# EAGLE board G22V4 (EAGLE 9.6.2)
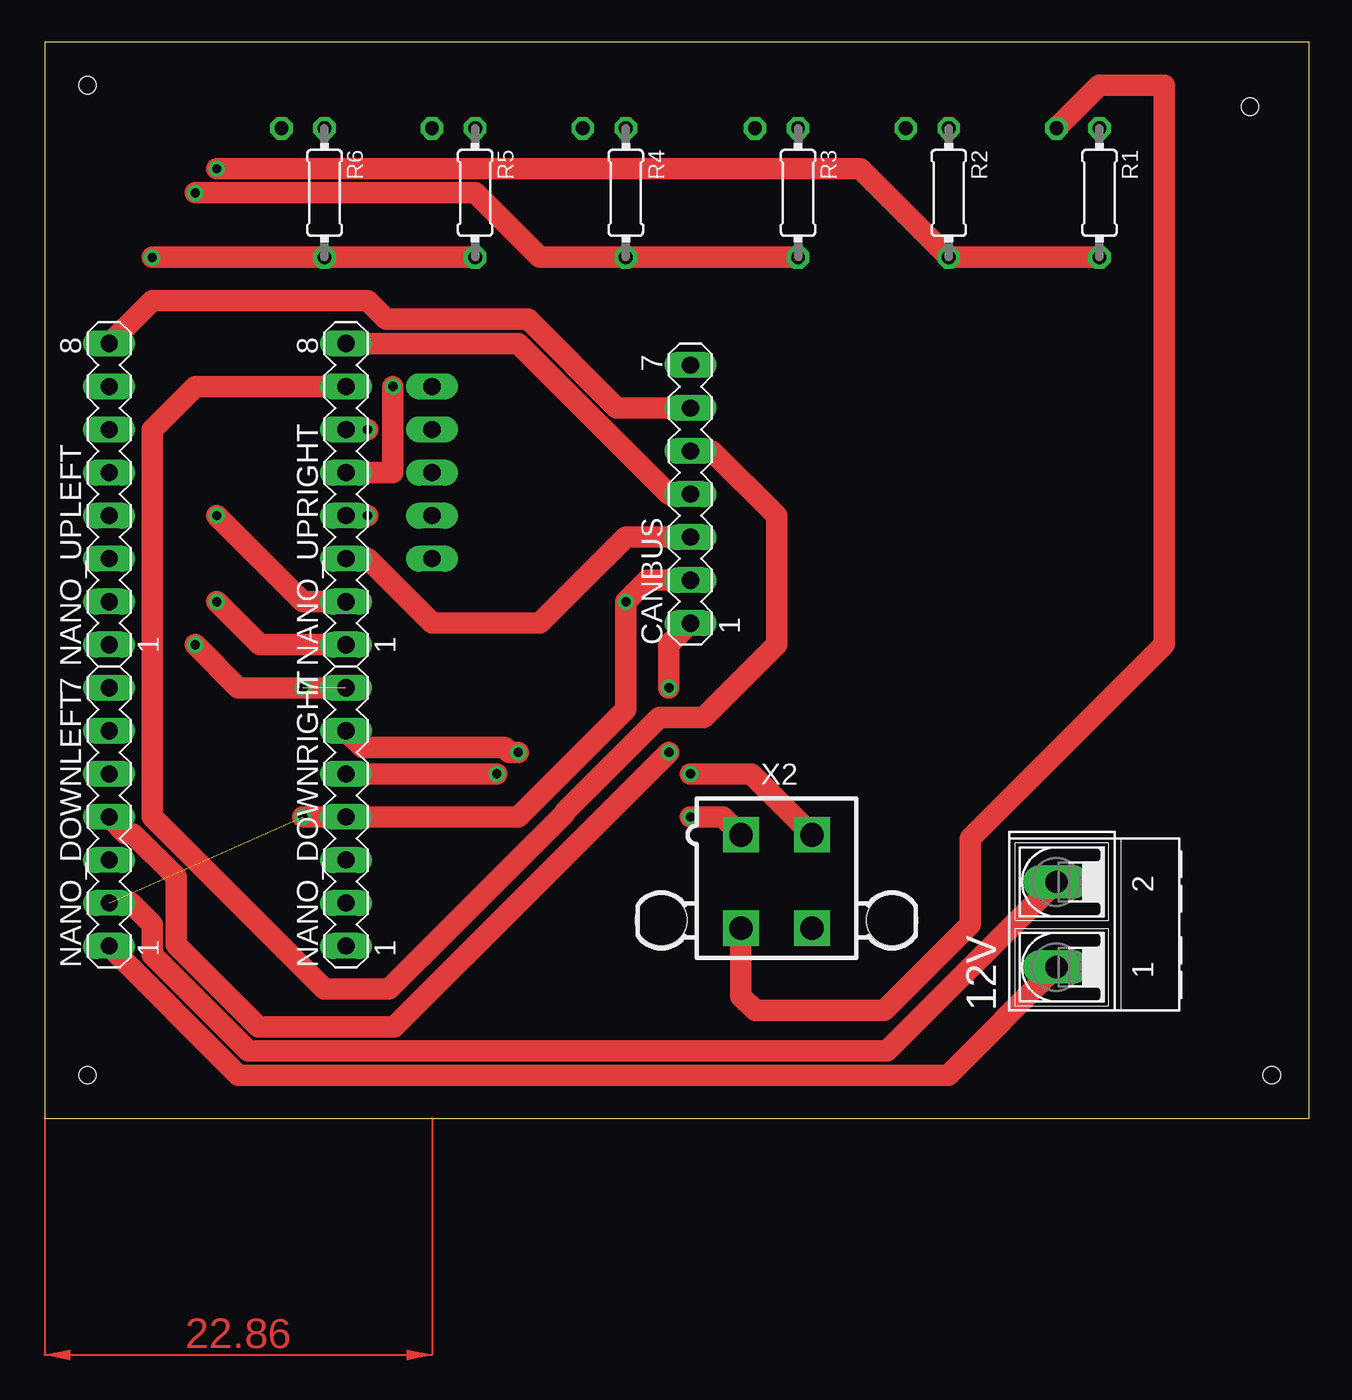
[diagram p0: board, top side]
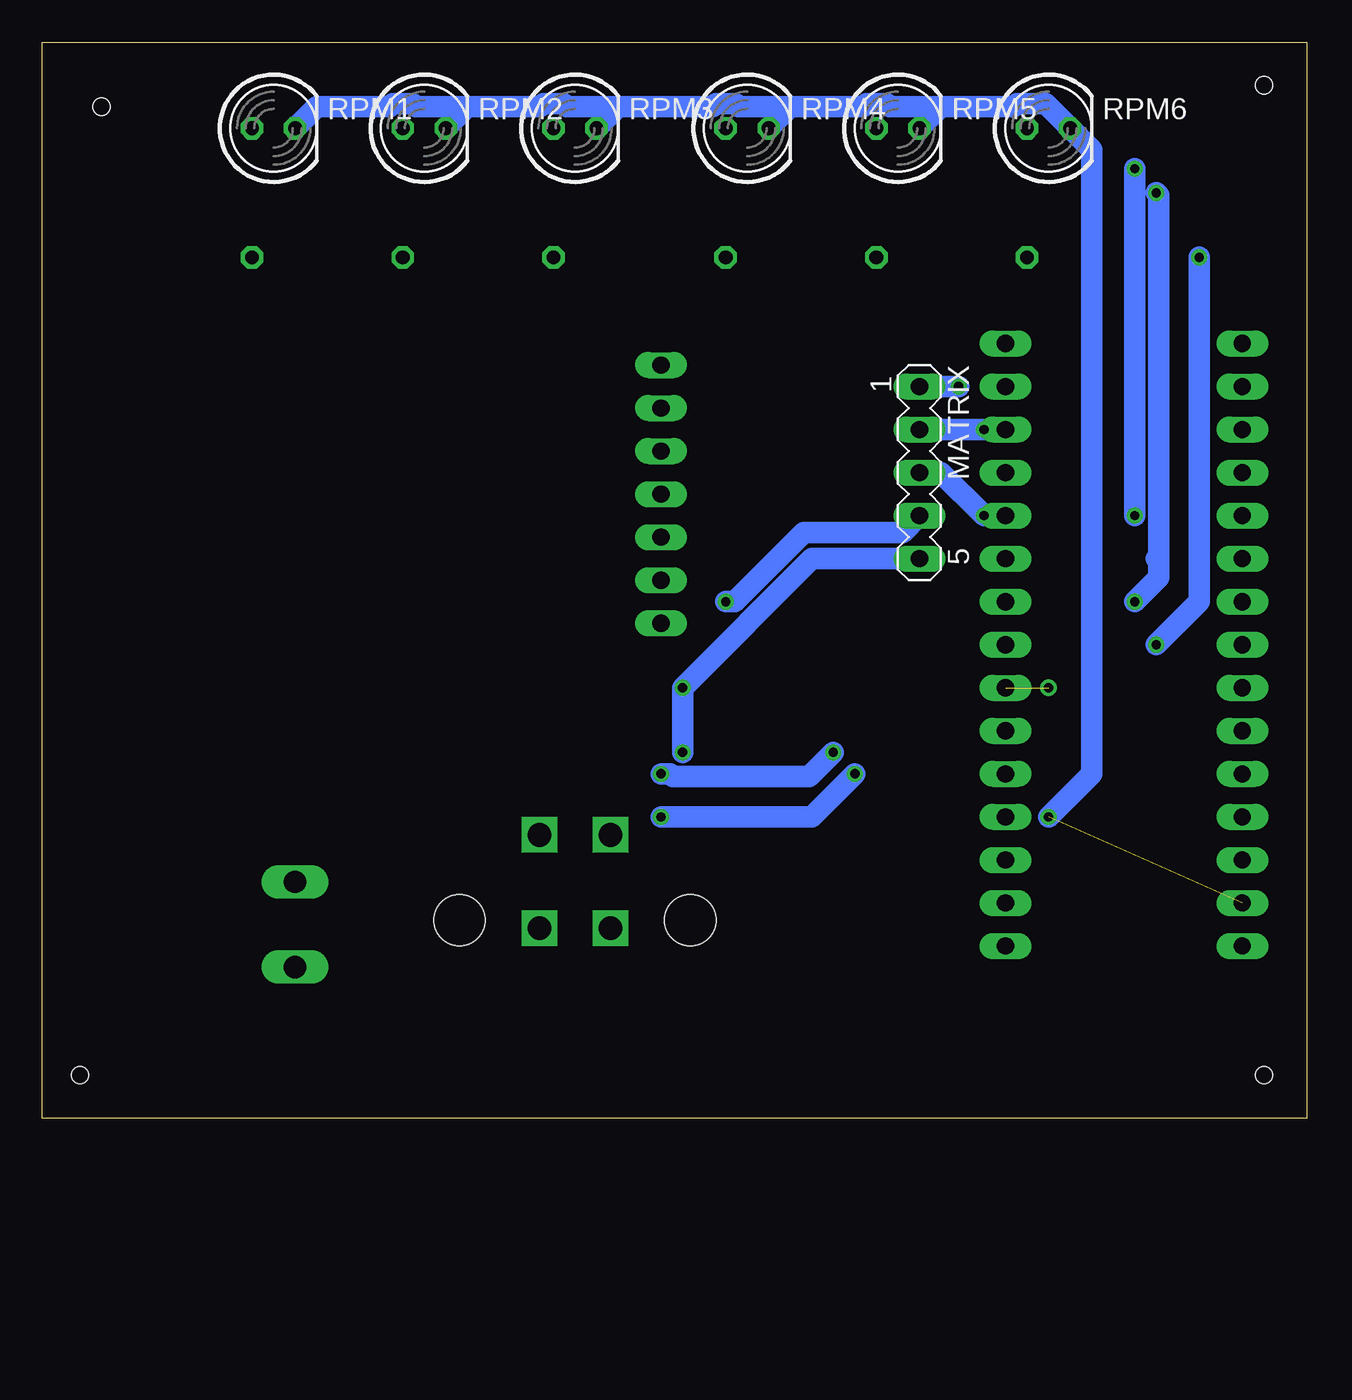
[diagram p1: board, bottom side, seen from below]

Size 74.6 x 63.49 mm. Coordinates in mm from the lower left corner, seen from the top.
Outline: 0,0 74.6,0 74.6,63.49 0,63.49 0,0
Copper layers (1*16): Top 0.035mm / dielectric 1.5mm / Bottom 0.035mm
Design rules "default": minimum track width 6mil, minimum drill 0.35mm, track to track 6mil, track to pad 6mil, pad to pad 6mil, via to via 6mil, smd to smd 6mil, copper to edge 40mil, drill to drill 6mil, minimum pad ring 10mil, minimum via ring 8mil, stop-mask expansion 4mil, vias tented up to drill 0mil, thermal gap 10mil
Holes 1 mm at 2.54,2.54 2.54,60.96 71.12,59.69 72.39,2.54

## Footprints (pad centres in the part's own frame; a part is rotated, then mirrored left to right if it is on the bottom)
AK500/2-H = drill 1.321 long: 1 -2.515,0; 2 2.515,0
MA07-1 = drill 1.016 long: 1 -7.62,0; 2 -5.08,0; 3 -2.54,0; 4 0,0; 5 2.54,0; 6 5.08,0; 7 7.62,0
MA05-1 = drill 1.016 long: 1 -5.08,0; 2 -2.54,0; 3 0,0; 4 2.54,0; 5 5.08,0
MA08-1 = drill 1.016 long: 1 -8.89,0; 2 -6.35,0; 3 -3.81,0; 4 -1.27,0; 5 1.27,0; 6 3.81,0; 7 6.35,0; 8 8.89,0
0204/7 = drill 0.813 octagon: 1 -3.81,0; 2 3.81,0
LED5MM = drill 0.813 octagon: A -1.27,0; K 1.27,0
5566-4 = drill 1.4 square: 1 2.1,-2.75; 2 -2.1,-2.75; 3 2.1,2.75; 4 -2.1,2.75 | hole 3: 6.8,2.29; -6.8,2.29

## Placement (x,y rotation side)
12V  [AK500/2-H]  59.69,11.43 90 top
CANBUS  [MA07-1]  38.1,36.83 90 top
MATRIX  [MA05-1]  22.86,38.1 270 bottom
NANO_DOWNLEFT  [MA07-1]  3.81,17.78 90 top
NANO_DOWNRIGHT  [MA07-1]  17.78,17.78 90 top
NANO_UPLEFT  [MA08-1]  3.81,36.83 90 top
NANO_UPRIGHT  [MA08-1]  17.78,36.83 90 top
R1  [0204/7]  62.23,54.61 270 top
R2  [0204/7]  53.34,54.61 270 top
R3  [0204/7]  44.45,54.61 270 top
R4  [0204/7]  34.29,54.61 270 top
R5  [0204/7]  25.4,54.61 270 top
R6  [0204/7]  16.51,54.61 270 top
RPM1  [LED5MM]  60.96,58.42 0 bottom
RPM2  [LED5MM]  52.07,58.42 0 bottom
RPM3  [LED5MM]  43.18,58.42 0 bottom
RPM4  [LED5MM]  33.02,58.42 0 bottom
RPM5  [LED5MM]  24.13,58.42 0 bottom
RPM6  [LED5MM]  15.24,58.42 0 bottom
X2  5566-4  [5566-4]  43.18,13.97 180 top

## Library data of the parts
12V = con-ptr500; OC_FARNELL: unknown; OC_NEWARK: unknown
CANBUS MATRIX NANO_DOWNLEFT NANO_DOWNRIGHT NANO_UPLEFT NANO_UPRIGHT = con-lstb; OC_FARNELL: unknown; OC_NEWARK: unknown
R1-R6 = rcl; SPICEPREFIX: R
RPM1-RPM6 = led
X2 = con-molex; MF: MOLEX; OC_FARNELL: unknown; OC_NEWARK: unknown

## Nets
A7: NANO_DOWNLEFT.5
CLK: MATRIX.1 NANO_UPRIGHT.5
CS_CAN: CANBUS.3 NANO_UPRIGHT.3
CS_MATRIX: MATRIX.2 NANO_UPRIGHT.6
D2: NANO_DOWNRIGHT.5 X2.1
D3: NANO_DOWNRIGHT.6 X2.2
D4: NANO_DOWNRIGHT.7 R5.2 R6.2
D5: NANO_UPRIGHT.1 R3.2 R4.2
D6: NANO_UPRIGHT.2 R1.2 R2.2
DIN: MATRIX.3 NANO_UPRIGHT.4
GND: 12V.2 CANBUS.2 MATRIX.4 NANO_DOWNLEFT.2 NANO_DOWNRIGHT.4 RPM1.K RPM2.K RPM3.K RPM4.K RPM5.K RPM6.K X2.3
MISO: CANBUS.4 NANO_UPRIGHT.8
MOSI: CANBUS.5 NANO_UPRIGHT.7
N$6: X2.4
N$13: NANO_DOWNRIGHT.3
N$14: NANO_DOWNRIGHT.2
N$15: NANO_DOWNRIGHT.1
N$17: NANO_UPLEFT.7
N$18: NANO_UPLEFT.6
N$19: NANO_UPLEFT.5
N$20: NANO_UPLEFT.4
N$21: NANO_UPLEFT.3
N$22: NANO_UPLEFT.2
N$23: NANO_UPLEFT.1
N$24: NANO_DOWNLEFT.7
N$25: NANO_DOWNLEFT.6
N$28: NANO_DOWNLEFT.3
N$29: R1.1 RPM1.A
N$30: R2.1 RPM2.A
N$31: R3.1 RPM3.A
N$32: R4.1 RPM4.A
N$33: R5.1 RPM5.A
N$34: R6.1 RPM6.A
SCK: CANBUS.6 NANO_UPLEFT.8
VCC: CANBUS.1 MATRIX.5 NANO_DOWNLEFT.4
VIN: 12V.1 NANO_DOWNLEFT.1

## Tracks (layer width: path | path; a pad name or v marks a point on that pad's centre or on a via)
CLK  (via drill 0.55)
  Top 1.27: NANO_UPRIGHT.5 20.55,38.1 v20.55,43.18
  Bottom 1.27: v20.55,43.18 MATRIX.1
CS_CAN
  Top 1.27: NANO_UPRIGHT.3 19.05,33.02 22.86,29.21 29.21,29.21 34.29,34.29 CANBUS.3
CS_MATRIX  (via drill 0.55)
  Top 1.27: NANO_UPRIGHT.6 v19.05,40.64
  Bottom 1.27: v19.05,40.64 MATRIX.2
D2  (via drill 0.55)
  Top 1.27: X2.1 40.02,17.78 v38.1,17.78 | v26.67,20.32 NANO_DOWNRIGHT.5
  Bottom 1.27: v38.1,17.78 29.21,17.78 v26.67,20.32
D3  (via drill 0.55)
  Top 1.27: X2.2 41.68,20.32 v38.1,20.32 | v27.94,21.59 27.41,21.59 27.13,21.87 18.77,21.87 NANO_DOWNRIGHT.6
  Bottom 1.27: v38.1,20.32 37.57,20.32 37.42,20.17 29.36,20.17 v27.94,21.59
D4  (via drill 0.55)  (1 unrouted)
  Top 1.27: R5.2 R6.2 v6.35,50.8 | v8.89,27.94 11.43,25.4 NANO_DOWNRIGHT.7
  Bottom 1.27: v6.35,50.8 6.35,30.48 v8.89,27.94
  other vias: 16.51,50.8 16.51,50.8 16.51,50.8 15.24,25.4
D5  (via drill 0.55)
  Top 1.27: R3.2 R4.2 29.21,50.8 25.4,54.61 v8.89,54.61 | v10.16,30.48 12.7,27.94 NANO_UPRIGHT.1
  Bottom 1.27: v8.89,54.61 8.74,54.46 8.74,33.17 | 8.74,33.17 8.89,33.02 | 8.74,33.17 8.74,31.9 v10.16,30.48
D6  (via drill 0.55)
  Top 1.27: R1.2 R2.2 48.11,56.03 v10.16,56.03 | v10.16,35.56 15.24,30.48 NANO_UPRIGHT.2
  Bottom 1.27: v10.16,56.03 v10.16,35.56
DIN  (via drill 0.55)
  Top 1.27: NANO_UPRIGHT.4 v19.05,35.56
  Bottom 1.27: v19.05,35.56 21.59,38.1 MATRIX.3
GND  (via drill 0.55)  (1 unrouted)
  Top 1.27: 12V.2 49.71,3.96 12.02,3.96 6.35,9.63 6.35,11.43 5.08,12.7 NANO_DOWNLEFT.2 | CANBUS.2 35.56,31.75 v34.29,30.48 34.29,24.13 27.94,17.78 NANO_DOWNRIGHT.4 v15.24,17.78 | X2.3 41.08,7.18 41.91,6.35 49.53,6.35 54.61,11.43 54.61,16.51 66.04,27.94 66.04,60.96 62.23,60.96 RPM1.K
  Bottom 1.27: 21.59,59.69 17.29,59.69 17.11,59.87 15.42,59.87 RPM6.K 12.7,57.15 12.7,20.32 v15.24,17.78 | 21.59,59.69 RPM5.K | 21.59,59.69 24.62,59.69 24.8,59.87 26,59.87 26.18,59.69 30.48,59.69 | 30.48,59.69 RPM4.K | 30.48,59.69 33.51,59.69 33.69,59.87 34.89,59.87 35.07,59.69 40.64,59.69 | RPM3.K 40.64,59.69 | 40.64,59.69 43.67,59.69 43.85,59.87 45.05,59.87 45.23,59.69 49.53,59.69 | 49.53,59.69 RPM2.K | 49.53,59.69 52.56,59.69 52.74,59.87 53.94,59.87 54.12,59.69 58.42,59.69 RPM1.K | v34.29,30.48 33.76,30.48 29.67,34.57 23.85,34.57 MATRIX.4
  other vias: 59.69,58.42
MISO
  Top 1.27: NANO_UPRIGHT.8 27.94,45.72 36.83,36.83 CANBUS.4
MOSI
  Top 1.27: NANO_UPRIGHT.7 8.89,43.18 6.35,40.64 6.35,17.78 16.51,7.62 20.32,7.62 30.69,17.99 30.69,18.07 36.26,23.64 38.88,23.64 43.18,27.94 43.18,35.56 39.37,39.37 CANBUS.5
SCK
  Top 1.27: CANBUS.6 33.76,41.91 28.53,47.14 20.17,47.14 19.05,48.26 6.35,48.26 NANO_UPLEFT.8
VCC  (via drill 0.55)
  Top 1.27: NANO_DOWNLEFT.4 4.8,16.79 5.21,16.79 7.77,14.23 7.77,10.22 12.61,5.38 20.62,5.38 v36.83,21.59 | v36.83,25.4 36.83,27.94 CANBUS.1
  Bottom 1.27: v36.83,21.59 v36.83,25.4 29.21,33.02 MATRIX.5
VIN
  Top 1.27: 12V.1 53.31,2.54 11.43,2.54 NANO_DOWNLEFT.1
(copper drawn outside any net)
  shapes: Top area x1